# Altium PCB Copy of PCB1.PcbDoc
Units mil, origin at the board's own origin, x right, y up, seen from the top; angles counter-clockwise.
Board outline 2362.2 x 2047.24 mil, 2 copper layers (Top Layer, Bottom Layer); 56 components, 38 nets, 175 pads, 17 vias.
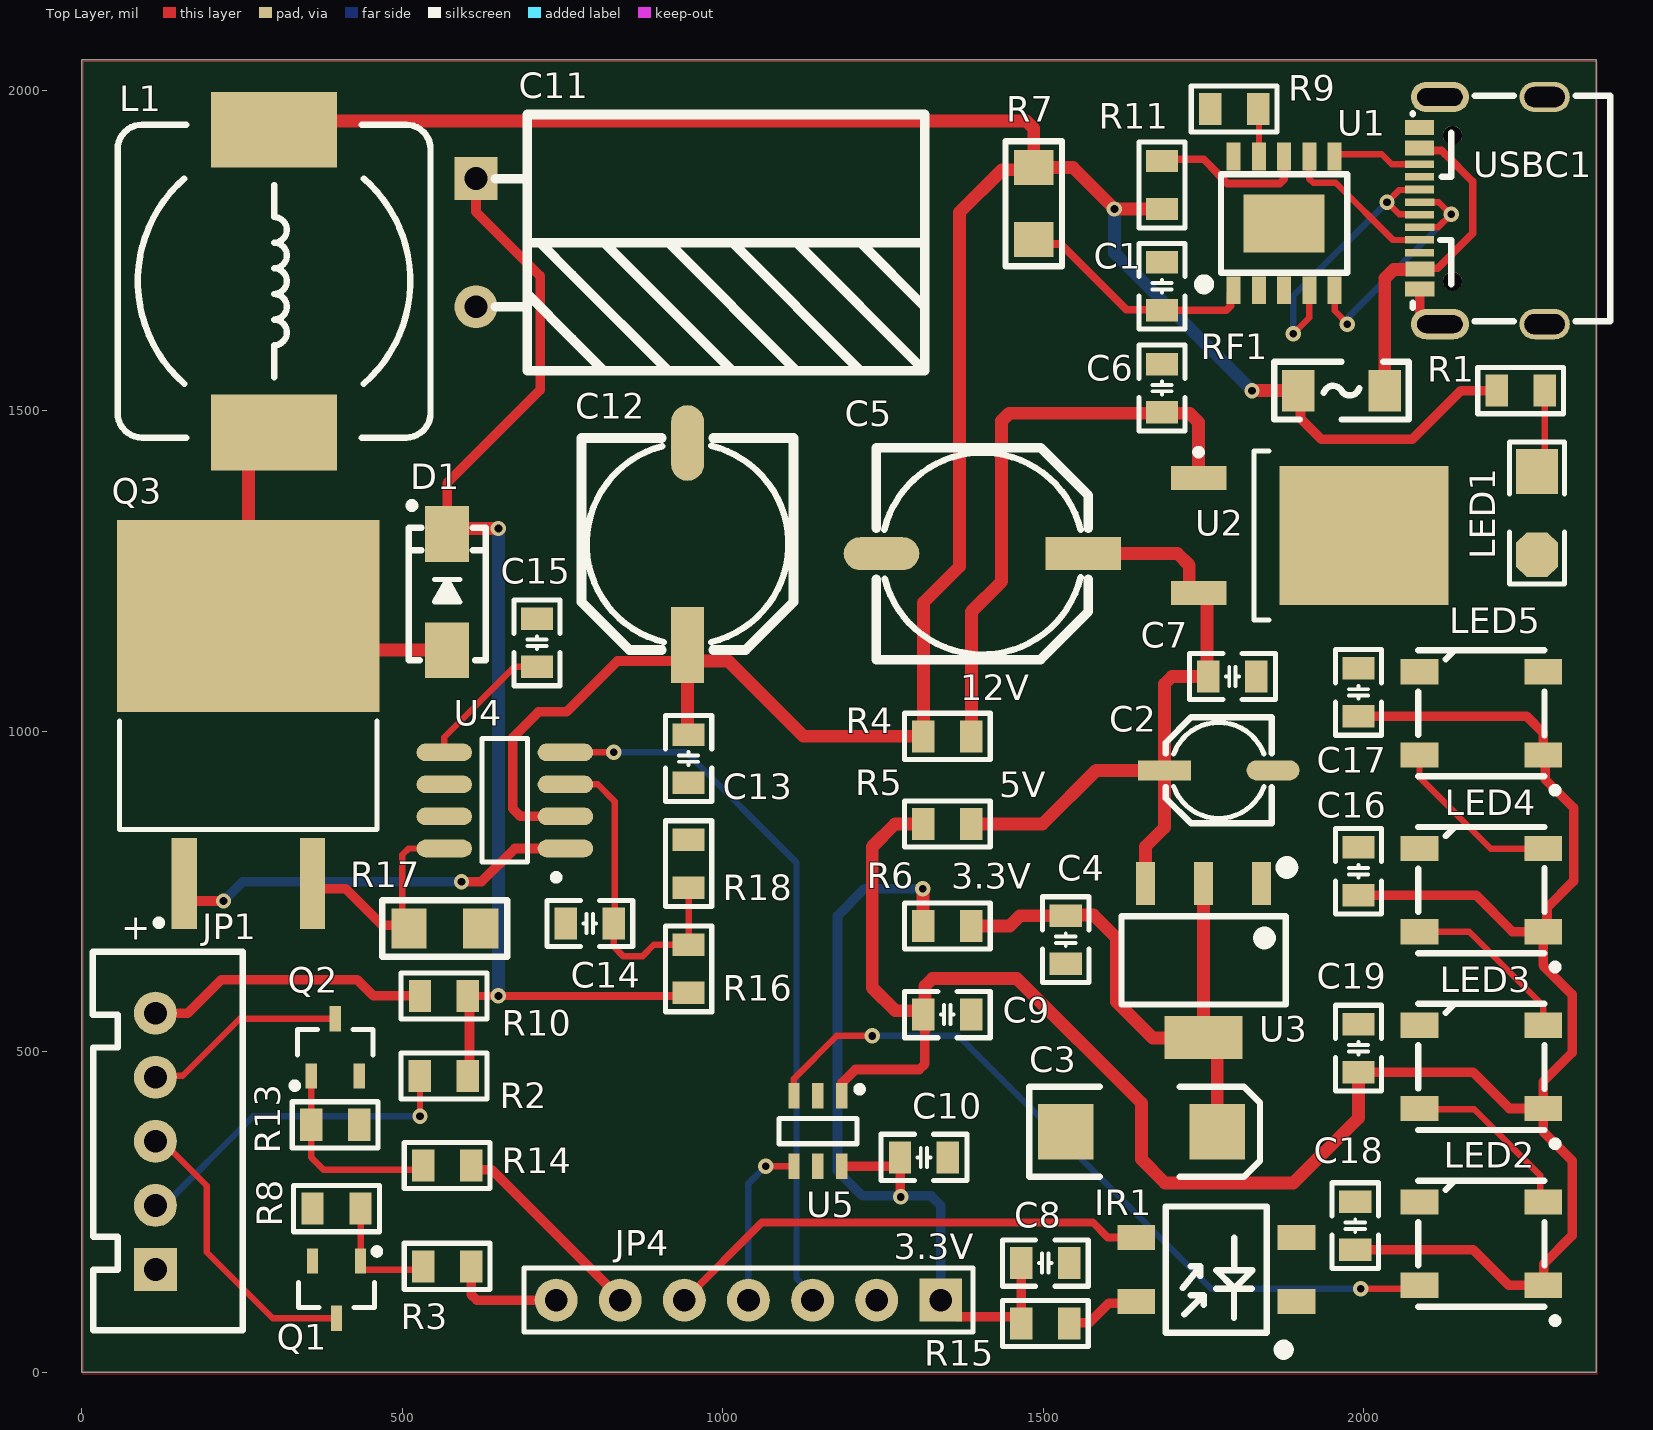
[diagram p0: Top Layer view]
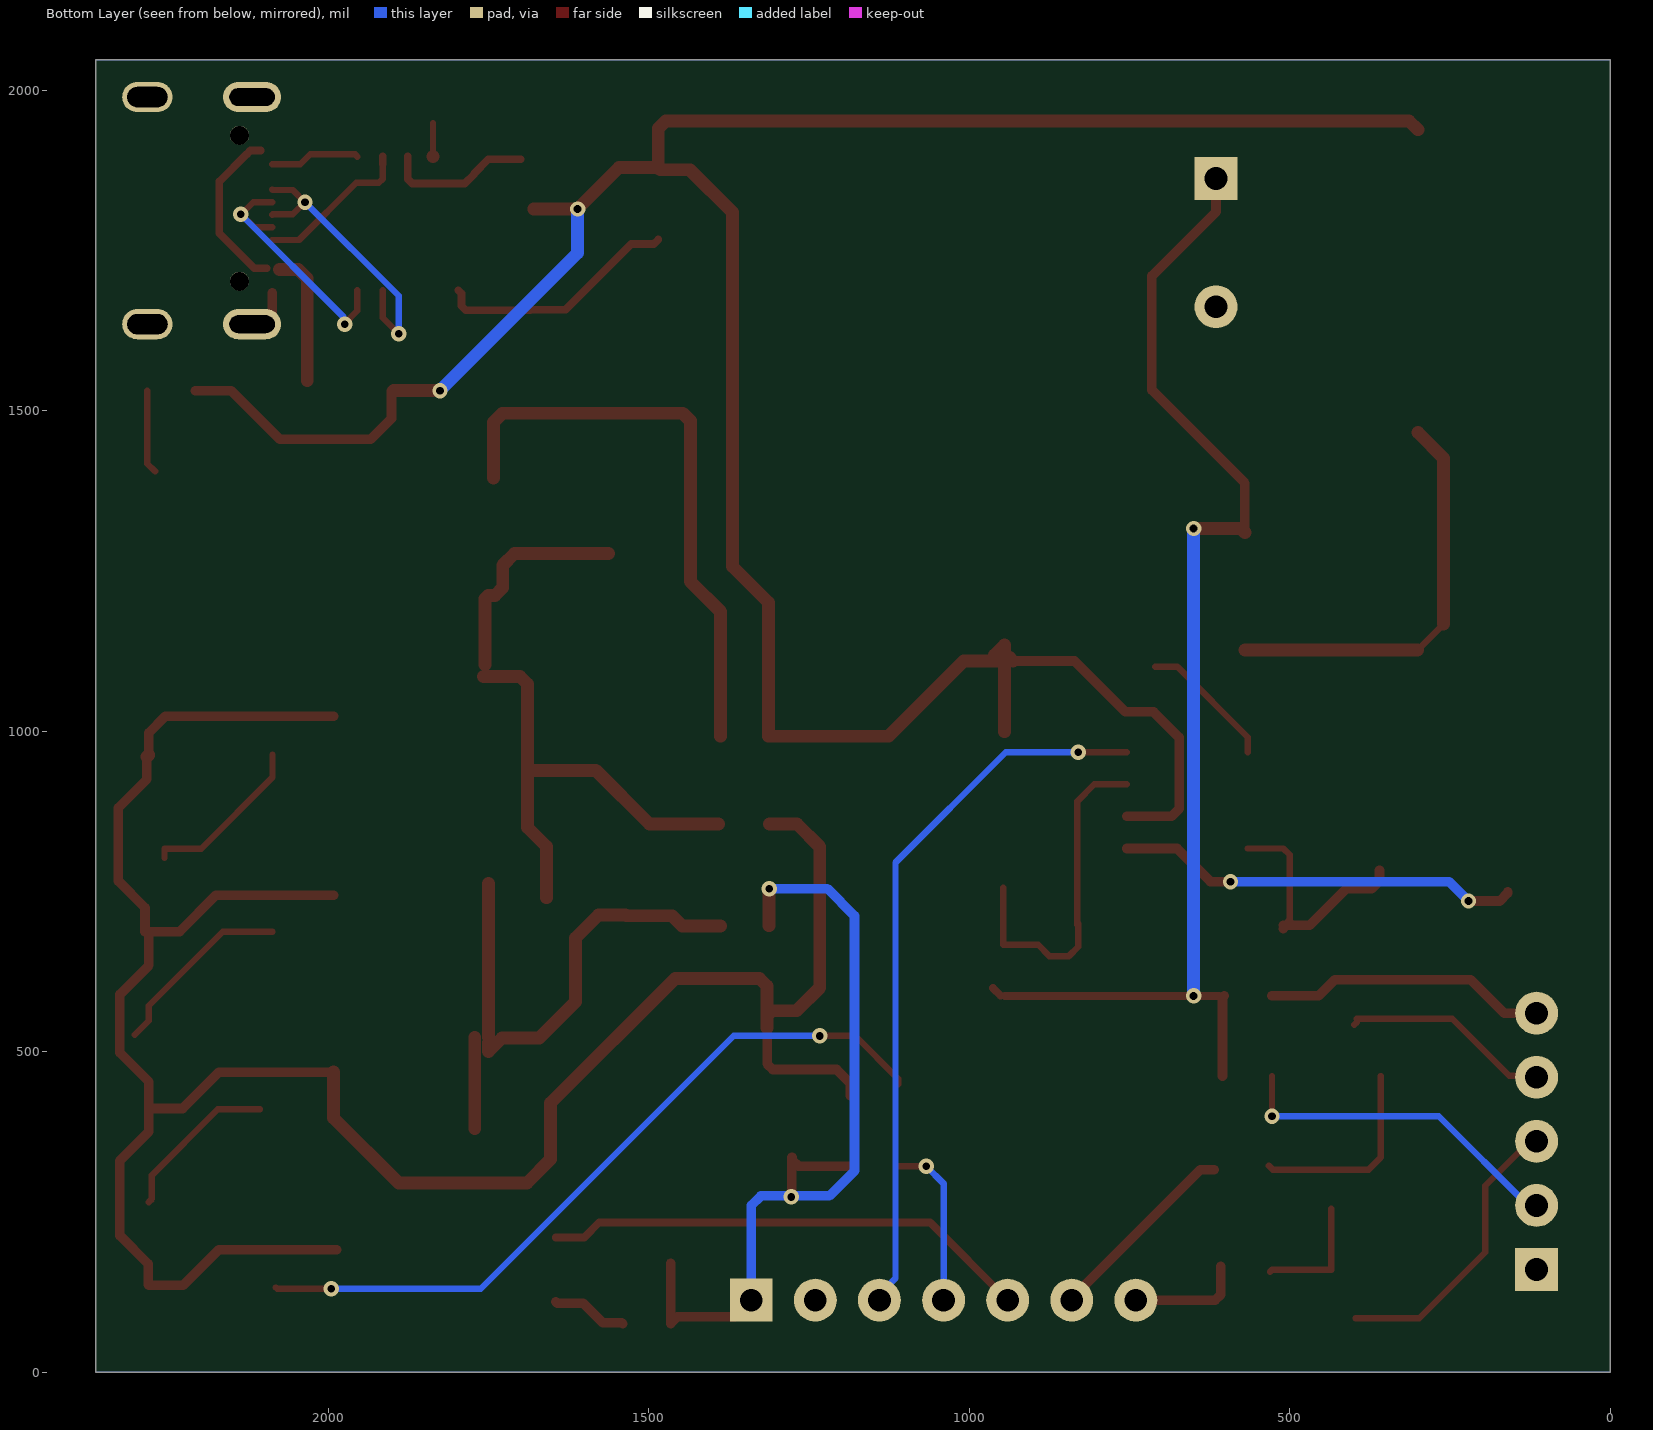
[diagram p1: Bottom Layer view, seen from below]

## Layer stack, top to bottom
Top Solder: solder mask 0.4, Solder Resist, Dk 3.5
Top Layer: signal copper 1.4
Dielectric 1: dielectric 12.6, FR-4, Dk 4.8
Bottom Layer: signal copper 1.4
Bottom Solder: solder mask 0.4, Solder Resist, Dk 3.5

## Board outline
0,0 0,2047.24 2362.2,2047.24 2362.2,0

## Design rules (kind name [scope] priority, off if disabled: settings)
AssemblyTestPointUsage [All] p0: scope1count=1 scope1_0_kind=Board scope1_0_value=Board scope2count=1 scope2_0_kind=Board scope2_0_value=Board commentlength=0
AssemblyTestpoint [All] p0: scope1count=1 scope1_0_kind=Board scope1_0_value=Board scope2count=1 scope2_0_kind=Board scope2_0_value=Board commentlength=0
Clearance [All] p0: scope1count=1 scope1_0_kind=Board scope1_0_value=Board scope2count=1 scope2_0_kind=Board scope2_0_value=Board commentlength=0 gap=8
Clearance [All] p1: gap=8 ignorepadtopadclearanceinfootprint=TRUE
ComponentClearance [All] p0: scope1count=1 scope1_0_kind=Board scope1_0_value=Board scope2count=1 scope2_0_kind=Board scope2_0_value=Board commentlength=0 gap=10 collisioncheckmode=3
DiffPairsRouting [All] p0: scope1count=1 scope1_0_kind=Board scope1_0_value=Board scope2count=1 scope2_0_kind=Board scope2_0_value=Board commentlength=0
FabricationTestPointUsage [All] p0: scope1count=1 scope1_0_kind=Board scope1_0_value=Board scope2count=1 scope2_0_kind=Board scope2_0_value=Board commentlength=0 valid=0 allowmultiple=FALSE
FabricationTestpoint [All] p0: scope1count=1 scope1_0_kind=Board scope1_0_value=Board scope2count=1 scope2_0_kind=Board scope2_0_value=Board commentlength=0 side=3 testpointundercomponent=TRUE minsize=40 maxsize=100 preferedsize=60 minholesize=0 maxholesize=40 preferedholesize=32 testpointgrid=1
FanoutControl Fanout_BGA [All] p0 off: scope1count=1 scope1_0_kind=Board scope1_0_value=Board scope2count=1 scope2_0_kind=Board scope2_0_value=Board commentlength=69 // Protel DXP Scope 1 Expression Was: IsBGA   Fanout_BGA (Default Rule)
FanoutControl Fanout_LCC [All] p0 off: scope1count=1 scope1_0_kind=Board scope1_0_value=Board scope2count=1 scope2_0_kind=Board scope2_0_value=Board commentlength=69 // Protel DXP Scope 1 Expression Was: IsLCC   Fanout_LCC (Default Rule)
FanoutControl Fanout_SOIC [All] p0 off: scope1count=1 scope1_0_kind=Board scope1_0_value=Board scope2count=1 scope2_0_kind=Board scope2_0_value=Board commentlength=71 // Protel DXP Scope 1 Expression Was: IsSOIC   Fanout_SOIC (Default Rule)
FanoutControl Fanout_Small [All] p0 off: scope1count=1 scope1_0_kind=Board scope1_0_value=Board scope2count=1 scope2_0_kind=Board scope2_0_value=Board commentlength=84 // Protel DXP Scope 1 Expression Was: (CompPinCount < 5)   Fanout_Small (Default Rule)
FanoutControl Fanout_Default [All] p0: scope1count=1 scope1_0_kind=Board scope1_0_value=Board scope2count=1 scope2_0_kind=Board scope2_0_value=Board commentlength=30 // Fanout_Default (Default Rule)
Height [All] p0: scope1count=1 scope1_0_kind=Board scope1_0_value=Board scope2count=1 scope2_0_kind=Board scope2_0_value=Board commentlength=0
HoleSize [All] p0: scope1count=1 scope1_0_kind=Board scope1_0_value=Board scope2count=1 scope2_0_kind=Board scope2_0_value=Board commentlength=0 absolutevalues=TRUE maxlimit=200 minlimit=10 maxpercent=80.000 minpercent=20.000
HoleSize [All] p1: absolutevalues=TRUE maxlimit=200 minlimit=10 maxpercent=80.000 minpercent=20.000
HoleToHoleClearance [All] p0: scope1count=1 scope1_0_kind=Board scope1_0_value=Board scope2count=1 scope2_0_kind=Board scope2_0_value=Board commentlength=0
LayerPairs [All] p0: scope1count=1 scope1_0_kind=Board scope1_0_value=Board scope2count=1 scope2_0_kind=Board scope2_0_value=Board commentlength=0 enforce=TRUE
MinimumSolderMaskSliver [All] p0: scope1count=1 scope1_0_kind=Board scope1_0_value=Board scope2count=1 scope2_0_kind=Board scope2_0_value=Board commentlength=0
MinimumSolderMaskSliver [All] p1: minsoldermaskwidth=2
NetAntennae [All] p0: scope1count=1 scope1_0_kind=Board scope1_0_value=Board scope2count=1 scope2_0_kind=Board scope2_0_value=Board commentlength=0
PasteMaskExpansion [All] p0: scope1count=1 scope1_0_kind=Board scope1_0_value=Board scope2count=1 scope2_0_kind=Board scope2_0_value=Board commentlength=0 expansion=0
PlaneClearance [All] p0: scope1count=1 scope1_0_kind=Board scope1_0_value=Board scope2count=1 scope2_0_kind=Board scope2_0_value=Board commentlength=0 clearance=20
PlaneConnect [All] p0: scope1count=1 scope1_0_kind=Board scope1_0_value=Board scope2count=1 scope2_0_kind=Board scope2_0_value=Board commentlength=0 planeconnectstyle=Relief reliefexpansion=20 reliefentries=4 reliefconductorwidth=15 reliefairgap=10
PlaneConnect [All] p1: planeconnectstyle=Relief reliefexpansion=20 reliefentries=4 reliefconductorwidth=15 reliefairgap=10
PolygonConnect [All] p0: scope1count=1 scope1_0_kind=Board scope1_0_value=Board scope2count=1 scope2_0_kind=Board scope2_0_value=Board commentlength=0 connectstyle=Relief reliefconductorwidth=12 reliefentries=4 polygonreliefangle="90 Angle"
PolygonConnect [All] p1: thpad.connectstyle=Relief thpad.reliefconductorwidth=12 thpad.reliefentries=4 thpad.polygonreliefangle="90 Angle" thpad.airgapwidth=10 smdpad.connectstyle=Relief smdpad.reliefconductorwidth=12 smdpad.reliefentries=4 smdpad.polygonreliefangle="90 Angle" smdpad.airgapwidth=10 via.connectstyle=Direct via.reliefconductorwidth=10 via.reliefentries=4 via.polygonreliefangle="90 Angle" via.airgapwidth=10
RoutingCorners [All] p0: scope1count=1 scope1_0_kind=Board scope1_0_value=Board scope2count=1 scope2_0_kind=Board scope2_0_value=Board commentlength=0 cornerstyle=45-Degree minsetback=100 maxsetback=100
RoutingLayers [All] p0: scope1count=1 scope1_0_kind=Board scope1_0_value=Board scope2count=1 scope2_0_kind=Board scope2_0_value=Board commentlength=0 top layer=Automatic bottom layer=Automatic
RoutingPriority [All] p0: scope1count=1 scope1_0_kind=Board scope1_0_value=Board scope2count=1 scope2_0_kind=Board scope2_0_value=Board commentlength=0
RoutingTopology [All] p0: scope1count=1 scope1_0_kind=Board scope1_0_value=Board scope2count=1 scope2_0_kind=Board scope2_0_value=Board commentlength=0 topology=Shortest
RoutingVias [All] p0: scope1count=1 scope1_0_kind=Board scope1_0_value=Board scope2count=1 scope2_0_kind=Board scope2_0_value=Board commentlength=0 holewidth=12 width=24 viastyle="Through Hole" minholewidth=12 minwidth=24 maxholewidth=15 maxwidth=32
RoutingVias [All] p1: holewidth=12 width=24 viastyle="Through Hole" minholewidth=12 minwidth=24 maxholewidth=15 maxwidth=32
ShortCircuit [All] p0: scope1count=1 scope1_0_kind=Board scope1_0_value=Board scope2count=1 scope2_0_kind=Board scope2_0_value=Board commentlength=0 allowed=FALSE
SilkToBoardRegionClearance [All] p0: scope1count=1 scope1_0_kind=Board scope1_0_value=Board scope2count=1 scope2_0_kind=Board scope2_0_value=Board commentlength=0
SilkToSilkClearance [All] p0: scope1count=1 scope1_0_kind=Board scope1_0_value=Board scope2count=1 scope2_0_kind=Board scope2_0_value=Board commentlength=0
SilkToSilkClearance [All] p1: silktosilkclearance=5
SilkToSolderMaskClearance [All] p0 off: scope1count=1 scope1_0_kind=Board scope1_0_value=Board scope2count=1 scope2_0_kind=Board scope2_0_value=Board commentlength=44 // Protel DXP Scope 1 Expression Was: IsPad
SilkToSolderMaskClearance [IsPad] p1: minsilkscreentomaskgap=5 clearancetoexposedcopper=TRUE
SolderMaskExpansion [All] p0: scope1count=1 scope1_0_kind=Board scope1_0_value=Board scope2count=1 scope2_0_kind=Board scope2_0_value=Board commentlength=0 expansion=4
SolderMaskExpansion [All] p1: expansion=4 istentingtop=FALSE
UnRoutedNet [All] p0: scope1count=1 scope1_0_kind=Board scope1_0_value=Board scope2count=1 scope2_0_kind=Board scope2_0_value=Board commentlength=0
UnpouredPolygon [All] p0: scope1count=1 scope1_0_kind=Board scope1_0_value=Board scope2count=1 scope2_0_kind=Board scope2_0_value=Board commentlength=0
Width power [All] p0: scope1count=1 scope1_0_kind=NetClass scope1_0_value=power scope2count=1 scope2_0_kind=Board scope2_0_value=Board commentlength=0 maxlimit=40 minlimit=10 preferedwidth=20
Width [All] p0: scope1count=1 scope1_0_kind=Board scope1_0_value=Board scope2count=1 scope2_0_kind=Board scope2_0_value=Board commentlength=0 maxlimit=40 minlimit=8 preferedwidth=10
Width power [InNetClass('power')] p1: maxlimit=40 minlimit=10 preferedwidth=20
Width [All] p2: maxlimit=40 minlimit=8 preferedwidth=10
25 further rules are at their usual default settings.

## Classes and differential pairs
net class power: GND NetC3_1 NetD1_1 V3.3 V5 V12 VH

## Components (designator, comment, footprint, x,y, rotation, side; value= is the part's Value field where it differs from the comment)
C1 "" "C 0805_L" 1685,1693.87 r90 top
C2 "Cap Pol1" "CM B(4*5.4)" 1773.71,938.75 r180 top
C3 "Cap Pol1" "CD C(6032)" 1652.98,375 r180 top
C4 "Cap" "C 0805_L" 1535,674.65 r90 top
C5 "Cap Pol1" "CM E(8*10.2)" 1405,1276.89 r0 top
C6 "Cap" "C 0805_L" 1685,1535.06 r270 top
C7 "Cap" "C 0805_L" 1795,1085 r180 top
C8 "Cap" "C 0805_L" 1503.07,170 r0 top
C9 "Cap" "C 0805_L" 1350.32,557.71 r180 top
C10 "Cap" "C 0805_L" 1313.78,335 r0 top
C11 "Cap Pol1" "CAP 5.0*10*16-H - GD" 615,1761.89 r270 top
C12 "Cap Pol1" "CM E(8*10.2)" 945,1291.89 r270 top
C13 "Cap" "C 0805_L" 946.71,957.15 r90 top
C14 "Cap" "C 0805_L" 792.6,699.81 r0 top
C15 "Cap" "C 0805_L" 710,1137.6 r90 top
C16 "Cap" "C 0805_L" 1991.57,781.36 r270 top
C17 "Cap" "C 0805_L" 1991.57,1060.36 r270 top
C18 "Cap" "C 0805_L" 1986.57,228.54 r270 top
C19 "Cap" "C 0805_L" 1991.57,505.36 r270 top
D1 "US1G" SMA 570,1216.89 r90 top
IR1 "IRM-H6XXT" SMD4_IR 1770,160 r180 top
JP1 "HDR-1X5" XH2.54-LI-5P 115,360 r90 top
JP4 "HDR-1X7" HDR2.54-LI-7P 1040,112.35 r180 top
L1 "Inductor Iron" CDRH127 300,1701.89 r270 top
LED1 "红色" "LED 1206R" 2270,1340.15 r270 top
LED2 "WS2812C" WS2812 2183.3,200.36 r180 top
LED3 "WS2812C" WS2812 2183.3,476.16 r180 top
LED4 "WS2812C" WS2812 2183.3,751.96 r180 top
LED5 "WS2812C" WS2812 2183.3,1027.76 r180 top
Q1 "A42" SOT23-3L 397.4,128.25 r180 top
Q2 "A42" SOT23-3L 395.32,506.89 r0 top
Q3 "IRF740" TO-263-2L 260,1010 r90 top
R1 "Resistor" "R 0805_L" 2244.6,1531.08 r180 top
R2 "Res Semi" "R 0805_L" 565,461.88 r0 top
R3 "Resistor" "R 0805_L" 570,165 r0 top
R4 "Resistor" "R 0805_L" 1350.32,991.89 r180 top
R5 "Resistor" "R 0805_L" 1350.32,854.89 r180 top
R6 "Resistor" "R 0805_L" 1350.32,695.94 r180 top
R7 "Resistor" "R 1206_L" 1485.06,1821.89 r90 top
R8 "Resistor" "R 0805_L" 397.4,255 r180 top
R9 "Resistor" "R 0805_L" 1797.62,1970.28 r0 top
R10 "Res Semi" "R 0805_L" 565,586.89 r180 top
R11 "Resistor" "R 0805_L" 1685,1851.85 r90 top
R13 "Resistor" "R 0805_L" 395.32,385.89 r0 top
R14 "Resistor" "R 0805_L" 570,322.23 r0 top
R15 "Resistor" "R 0805_L" 1503.07,75.71 r180 top
R16 "Res Semi" "R 0805_L" 946.71,629.13 r90 top
R17 "Res Semi" "R 1206_L" 565.51,691.89 r0 top
R18 "Resistor" "R 0805_L" 946.72,793.14 r270 top
RF1 "FR50-16" "FU 1206" 1965.13,1531.09 r180 top
U1 "CH224K" ESSOP10 1875.63,1791.89 r90 top
U2 "L78M05" TO-252 1915.35,1305 r0 top
U3 "LT1117-3V3" SOT223_L 1750,642.25 r180 top
U4 "MAX1771" SOIC8 660,891.89 r180 top
U5 "SN74LVC1T45" SOT23-6L 1148.36,376.28 r180 top
USBC1 "TYPE-C 2.0 -16P" USB-C-SMD_TYPE-C-USB-5 2184.56,1811.89 r90 top

## Footprints (in the part's own frame and the unit in brackets; to place one, negate y for a bottom-side part, rotate by r counter-clockwise, add the part's x,y. Pads: shape width x height; smd on the part's side, far side on the other; paste and mask are expansions set on the pad)
"C 0805_L" [mil] "无极性贴片电容                                        淘宝ID:黄晶宝石"
  rect 35x50 smd: 1(-37.4,0) 2(37.4,0)
  silkscreen extent -67,-36 67,36
"CAP 5.0*10*16-H - GD" [mm] "脚距5mm直径10mm高度16mm"
  rect 1.7x1.7 hole 0.9: 1(-2.54,0)
  round 1.7 hole 0.9: 2(2.54,0)
  silkscreen extent -5.08,0.76 5.08,17.78
"CD C(6032)" [mm] "长6.0mm，宽3.2mm，厚2.5mm      淘宝ID:黄晶宝石"
  rect 2.2x2.2 smd: 1(-3,0) 2(3,0)
  silkscreen extent -4.7,-1.78 4.44,1.78
CDRH127 [mm] "12*12*8mm（长宽高）"
  rect 3x5 smd: 1(-6,0) 2(6,0)
  silkscreen extent -6.2,-6.2 6.2,6.2
"CM B(4*5.4)" [mm] "贴片电解电容，直径4mm，高5.4mm"
  rect 2.1x0.8 smd: 1(2.15,0)
  oval 2.1x0.8 smd: 2(-2.15,0)
  silkscreen extent -2.1,-2.1 2.1,2.1
"CM E(8*10.2)" [mm] "贴片电解电容，直径8mm，高10.2mm"
  rect 3x1.3 smd: 1(4,0)
  oval 3x1.3 smd: 2(-4,0)
  silkscreen extent -4.2,-4.2 4.2,4.2
ESSOP10 [mm] "ESSOP3.9mm"
  rect 2.3x3.2 smd: 0(0,0)
  rect 1.1x0.55 smd: 1(-2.65,2) 2(-2.65,1) 3(-2.65,0) 4(-2.65,-1) 5(-2.65,-2) 6(2.65,-2) 7(2.65,-1) 8(2.65,0) 9(2.65,1) 10(2.65,2)
  silkscreen extent -2.61,-2.5 1.95,3.37
"FU 1206" [mil] "贴片保险丝"
  rect 50x65 smd: 1(-67.5,0) 2(67.5,0)
  silkscreen extent -105,-45 105,45
HDR2.54-LI-7P [mm] "排针，7脚"
  rect 1.7x1.7 hole 0.9: 1(-7.62,0)
  round 1.7 hole 0.9: 2(-5.08,0) 3(-2.54,0) 4(0,0) 5(2.54,0) 6(5.08,0) 7(7.62,0)
  silkscreen extent -8.89,-1.27 8.89,1.27
"LED 1206R" [mil] "红色1206LED       淘宝ID:黄晶宝石"
  rect 70x65 smd: 1(-65,0)
  oct 70x65 smd: 2(65,0)
  silkscreen extent -111,-43 111,43
"R 0805_L" [mil] "1/8W贴片电阻"
  rect 35x50 smd: 1(-37.4,0) 2(37.4,0)
  silkscreen extent -67,-36 67,36
"R 1206_L" [mil] "1/4W贴片电阻"
  rect 55x62 smd: 1(-55.12,0) 2(57.09,0)
  silkscreen extent -96,-44 98,44
SMA [mm] "4.5x2.6*2.2mm（长宽高，不包括引脚）"
  rect 2.2x1.75 smd: 1(-2.3,0) 2(2.3,0)
  silkscreen extent -2.7,-1.52 3.56,1.52
SMD4_IR [mm]
  rect 1.5x1 smd: 1(-3.175,1.27) 2(-3.175,-1.27) 3(3.175,-1.27) 4(3.175,1.27)
  silkscreen extent -2.87,-2.5 2,3.37
SOIC8 [mm]
  oval 2.2x0.7 smd: 1(-2.4,1.905) 2(-2.4,0.635) 3(-2.4,-0.635) 4(-2.4,-1.905) 5(2.4,-1.905) 6(2.4,-0.635) 7(2.4,0.635) 8(2.4,1.905)
  silkscreen extent -2.16,-2.45 0.9,3.17
SOT23-3L [mm] "3x1.3x1mm(长宽高)    封装库来自淘宝卖家 ID：黄晶宝石"
  rect 0.45x1 smd: 1(-0.95,-1.143) 2(0.95,-1.143) 3(0,1.125)
  silkscreen extent -1.73,-1.65 1.5,0.7
SOT23-6L [mm] "3x1.6x1.1mm(长宽高) 封装库来自淘宝卖家 ID：黄晶宝石"
  rect 0.45x1 smd: 1(-0.95,-1.397) 2(0,-1.397) 3(0.95,-1.397) 4(0.95,1.397) 5(0,1.397) 6(-0.95,1.397)
  silkscreen extent -1.78,-1.78 1.55,0.51
SOT223_L [mm] "6.4x7x1.6mm(长宽高)"
  rect 0.75x1.7 smd: 1(-2.3,-3.048) 2(0,-3.048) 3(2.3,-3.048)
  rect 3.1x1.7 smd: 2(0,3.048)
  silkscreen extent -3.5,-3.88 3.25,1.75
TO-252 [mm]
  rect 2.2x0.95 smd: 1(-4.4,2.28) 3(-4.4,-2.28)
  rect 6.7x5.5 smd: 2(2.15,0)
  silkscreen extent -4.52,-3.35 -1.6,3.43
TO-263-2L [mm]
  rect 3.6x1 smd: 1(-6.3,2.54) 3(-6.3,-2.54)
  rect 7.6x10.4 smd: 2(4.3,0)
  silkscreen extent -7.97,-5.1 0.15,5.1
USB-C-SMD_TYPE-C-USB-5 [mm]
  oval 1.2x2 hole 0.8 slot 1.6 at 90 deg: 0(-4.5,-2.475) 0(4.5,-2.475)
  oval 1.2x2.3 hole 0.7 slot 1.8 at 90 deg: 0(-4.5,1.675) 0(4.5,1.675)
  rect 0.3x1.15 smd: A1(-3.263,2.473) A4(-2.462,2.471) A5(-1.162,2.475) A6(-0.162,2.475) A7(0.337,2.473) A9(2.638,2.475) A12(3.438,2.475) B1(3.138,2.475) B4(2.337,2.475) B5(1.838,2.475) B6(0.838,2.475) B7(-0.663,2.473) B9(-2.162,2.471) B12(-2.963,2.473)
  rect 0.3x1.148 smd: A8(-1.663,2.475) B8(1.337,2.475)
  round 0.75 hole 0.75 unplated: ""(-2.803,1.175) ""(2.978,1.175)
  silkscreen extent -4.38,-5.08 4.56,2.75
WS2812 [mm]
  rect 1.5x1 smd: 1(-2.45,1.65) 2(-2.45,-1.65) 3(2.45,-1.65) 4(2.45,1.65)
  silkscreen extent -3.05,-2.5 2.5,3.17
XH2.54-LI-5P [mm] "接插件，5P  淘宝ID:黄晶宝石   店铺网址:https://shop463601444.taobao.com"
  rect 1.7x1.7 hole 0.9: 1(-5.08,0)
  round 1.7 hole 0.9: 2(-2.54,0) 3(0,0) 4(2.54,0) 5(5.08,0)
  silkscreen extent -7.48,-3.45 7.52,2.49

## Part data
C1: library part Cap, "Capacitor"
C2 C3: "Polarized Capacitor (Radial)"
C4 C6 C7 C8 C9 C10 C13 C14 C15 C16 C17 C18 C19: "Capacitor"
C5 C12: library part "Cap Pol1_2", "Polarized Capacitor (Radial)"
C11: library part "Cap Pol1_3", "Polarized Capacitor (Radial)"
D1: library part "D Schottky", "Schottky Diode"
IR1: library part IR
JP1: library part "Header 5", "5P接插件"
JP4: library part "Header 7", "7P接插件"
L1: "Magnetic-Core Inductor"
LED1: library part LED-SMD, "贴片LED"
LED2 LED3 LED4 LED5: library part WS2812, "RGB发光管"
Q1 Q2: library part BCP68, "NPN三极管"
Q3: library part NMOS-2, "N-Channel Power MOSFET"
R2 R10 R16 R17: "Semiconductor Resistor"
RF1: library part PPTC, "PPTC自恢复保险丝"
U1: "PD协议受电芯片"
U3: library part AMS1117, "三端稳压芯片"
U5: "单路逻辑电平转换"
USBC1: library part "USB2.0 Type-C 16Pin母座", "USB2.0 Type-C 母座 16Pin"

## Via types
v1: diameter 24, hole 12, Top Layer to Bottom Layer, tented both sides, 17 vias

## Nets (pads, with @x,y where several pads share a name; then routed paths per layer and width w, separated by ;. In a path a pad name is that pad's centre, name@x,y a point inside that pad or via, vN(x,y) a via of type N, cw(c..) or ccw(c..) an arc to the next point about the centre after c; other vN are vias at no path point)
CC1: U1.7 USBC1.A5 | length 258.5
  Top Layer w10: U1.7 1915,1861.17 1921.01,1855.17 1956.36,1855.17 2045.4,1766.12 USBC1.A5
  Top Layer w12: U1.7@1915,1884.23 U1.7
CC2: U1.6 USBC1.B5 | length 140.7
  Top Layer w10: U1.6 1957.91,1899.76 2027.87,1899.76 2043.4,1884.24 USBC1.B5
DM: U1.5 USBC1.A7 USBC1.B7 | length 413.2
  Top Layer w10: U1.5 1954.37,1655.48 1974.06,1635.79 v1(1974.06,1634.72) ; USBC1.B7 2115.76,1785.8 v1(2136.22,1806.27) ; USBC1.A7 2116.81,1825.17 2134.83,1807.16 v1@2134.83,1806.27
  Bottom Layer w10: v1(1974.06,1634.72) 1976.73,1637.4 1976.73,1646.78 v1(2136.22,1806.27)
DP: U1.4 USBC1.A6 USBC1.B6 | length 462.1
  Top Layer w10: v1(1890,1620) 1915,1645 U1.4 ; USBC1.A6 2086.35,1806.27 2055.3,1806.27 v1@2036.4,1825.17 ; USBC1.B6 2086.34,1844.08 2055.3,1844.08 v1@2036.4,1825.17 ; v1@2036.4,1825.17 v1(2036.03,1825.17) v1@2036.4,1825.17
  Bottom Layer w10: v1(1890,1620) 1890,1679.15 v1(2036.03,1825.17)
GND: C1.2 C2.2 C3.2 C4.1 C5.2 C6.1 C7.1 C8.2 C9.1 C10.2 C11.2 C12.2 C13.1 C14.1 C15.2 C16.1 C17.1 C18.1 C19.1 IR1.1 IR1.2 JP1.1 JP4.2 LED1.2 LED2.3 LED3.3 LED4.3 LED5.3 Q1.2 Q2.2 R8.2 R9.1 R13.2 R17.2 R18.1 U1.0 U2.2 U3.1 U4.6 U4.7 U5.2 U5.5 USBC1.0 USBC1.A1 USBC1.A12 USBC1.B1 USBC1.B12 | length 69.8
  Top Layer w10: USBC1.A1@2086.28,1682.54 USBC1.A1 ; USBC1.0@2087.18,1654.59 2107.05,1634.72 USBC1.0@2118.62,1634.72
  Top Layer w15: USBC1.0@2087.18,1654.59 USBC1.A1
HV_EN: JP4.3 U4.4 | length 1124.7
  Top Layer w10: U4.4 v1(830,966.89)
  Bottom Layer w10: v1(830,966.89) 943.11,966.89 1115,795 1115,146.67 1140,121.67 JP4.3
IR: IR1.3 JP4.5 | length 764.9
  Top Layer w12: JP4.5 1061.15,233.5 1577.18,233.5 1600.68,210 IR1.3
NetC1_1: C1.1 R7.1 U1.1 | length 381.4
  Top Layer w12: R7.1 1491.98,1759.85 1527.03,1759.85 1629.8,1657.09 C1.1@1685,1657.09 ; C1.1 1785.03,1656.47 1792.06,1663.5 1792.06,1682.73 U1.1
NetC2_1: C2.1 C5.1 C7.2 R5.1 U2.3 U3.3 | length 1088.5
  Top Layer w20: R5.1@1390.94,854.89 1498.69,854.89 1582.54,938.75 1663.9,938.75 C2.1@1680.2,938.75 ; C5.1 1709.43,1276.89 1727.6,1258.72 1727.6,1223.94 1739.86,1211.68 1750.21,1211.68 1755.35,1206.54 C7.2@1755.35,1103.36 ; U3.3@1659.45,740 1659.45,820.09 1689.06,849.7 C2.1 1689.06,1073.29 1700.78,1085 C7.2
NetC3_1: C3.1 C4.2 R6.1 U3.2 | length 911.2
  Top Layer w20: R6.1 1447.63,695.94 1463.74,712.05 C4.2 ; C4.2@1536.02,713.27 1578.28,713.27 1614.17,677.38 1614.17,577.78 1670.69,521.26 1728.74,521.26 1750,500 U3.2@1750,514.29 ; U3.2@1750,522.25 U3.2@1750,762.25 ; C3.1@1771.22,380 U3.2@1771.22,522.25
NetC6_2: C6.2 R4.1 U2.1 | length 916.7
  Top Layer w20: R4.1 1387.72,1186.07 1435,1233.35 1435,1484.14 1446.72,1495.85 1728.11,1495.85 1742.13,1481.83 U2.1
NetC14_2: C14.2 R16.2 R18.2 U4.3 | length 537
  Top Layer w10: U4.3 805,916.89 831.16,890.73 C14.2@831.16,699.8 ; C14.2@831.16,697.89 C14.2@831.16,699.8 ; R18.2 R16.2 892.4,666.53 874.9,649.03 844.41,649.03 830,663.45 C14.2 C14.2@831.16,699.8
NetC15_1: C15.1 U4.5 | length 213.5
  Top Layer w10: U4.5 565.51,990.51 675.2,1100.2 C15.1
NetD1_1: D1.1 L1.2 Q3.2 | length 642.1
  Top Layer w10: Q3.2@260,1166.89 Q3.2@300.55,1126.34
  Top Layer w20: Q3.2@260,1166.89 260,1425.67 L1.2 ; Q3.2@300.55,1126.34 D1.1
NetIR1_4: IR1.4 R15.1 | length 118.7
  Top Layer w15: R15.1 1542.07,77.31 1571.68,77.31 1601.76,107.38 1642.39,107.38 IR1.4
NetJP1_2: JP1.2 R2.1 | length 526.3
  Top Layer w10: v1(527.6,399.37) R2.1
  Bottom Layer w10: JP1.2 128.18,260 267.55,399.37 v1@521.02,399.37
NetJP1_3: JP1.3 Q1.3 | length 457.5
  Top Layer w10: JP1.3 125.58,360 195,290.58 195,186.89 297.93,83.96 Q1.3
NetJP1_4: JP1.4 Q2.3 | length 323.5
  Top Layer w10: JP1.4 117.55,462.55 157.61,462.55 246.23,551.18 Q2.3 ; Q2.3@395.32,545.55 Q2.3@399.17,541.69
NetJP1_5: JP1.5 R10.2 | length 444.4
  Top Layer w15: JP1.5 165.46,560 217.35,611.89 430,611.89 455,586.89 R10.2
NetLED1_1: LED1.1 R1.1 | length 130.9
  Top Layer w10: LED1.1 2282.01,1417.16 R1.1
NetLED2_2: LED2.2 LED3.4 | length 255.1
  Top Layer w10: LED3.4@2106.38,410 2172.23,410 2274.89,307.34 2274.89,270.18 LED2.2
NetLED3_2: LED3.2 LED4.4 | length 294.9
  Top Layer w10: LED4.4 2164.45,687 2279.74,571.72 2279.74,548.15 LED3.2@2301.45,526.44
NetLED4_2: LED4.2 LED5.4 | length 263.7
  Top Layer w10: LED5.4 2086.85,927.76 2198.2,816.41 2255.23,816.41 LED4.2@2255.25,802.25
NetQ1_1: Q1.1 R3.1 R8.1 | length 192.2
  Top Layer w10: Q1.1@434.8,160 527.07,160 R3.1@530.7,156.37 ; Q1.1@435,160.2 R8.1@435,255
NetQ2_1: Q2.1 R13.1 R14.1 | length 312.2
  Top Layer w10: Q2.1 R13.1 357.92,378.38 357.91,351.88 357.91,334.93 377.04,315.8 526.16,315.8 R14.1
NetQ3_1: Q3.1 U4.1 | length 635.8
  Top Layer w15: Q3.1@160,749.57 160,747.19 172.19,735 v1(221.11,735) ; v1(592.42,765.17) 623.8,765.17 675.52,816.89 U4.1
  Bottom Layer w15: v1(221.11,735) 251.28,765.17 v1(592.42,765.17)
NetQ3_3: Q3.3 R17.1 U4.8 | length 378.8
  Top Layer w10: R17.1@500,706.77 500,806.89 510,816.89 U4.8
  Top Layer w15: Q3.3@360,782.68 360,766.19 372.19,754 412.05,754 468.67,697.38 509.39,697.38 R17.1@509.88,696.89 ; R17.1@500.51,701.77 R17.1
NetR9_2: R9.2 U1.9 | length 52.4
  Top Layer w10: U1.9@1836.43,1896.39 R9.2@1836.43,1948.52
  Top Layer w20: U1.9 U1.9@1836.43,1896.39
NetR11_2: R11.2 U1.8 | length 229.8
  Top Layer w12: R11.2@1700,1891.89 1750,1891.89 1772.06,1869.83 1772.06,1868.77 1786.69,1854.14 1868.6,1854.14 1875.63,1861.17 U1.8
NixieTubeA: JP4.6 R14.2 | length 333.1
  Top Layer w15: R14.2@618.2,315.8 639.2,315.8 830.06,124.94 830.06,96.83 JP4.6@840,86.89
NixieTubeB: JP4.7 R3.2 | length 180.1
  Top Layer w15: R3.2 607.4,121.14 616.19,112.35 JP4.7
RGB: LED2.4 U5.3 | length 1171.5
  Top Layer w10: U5.3@1110.96,448.79 1110.96,457.59 1177.87,524.5 v1(1233.22,524.5) ; v1(1995,129.87) 2079.48,129.87 LED2.4@2081.63,132.01
  Bottom Layer w10: v1(1233.22,524.5) 1367.39,524.5 1762.02,129.87 v1(1995,129.87)
RGB_ESP: JP4.4 U5.4 | length 264.3
  Top Layer w10: v1(1067.07,321.28) U5.4
  Bottom Layer w10: JP4.4@1039.34,112.35 1040,113.01 1040,294.22 v1(1067.07,321.28)
V3.3: C8.1 C10.1 JP4.1 R6.2 R15.2 U5.6 | length 1332.9
  Top Layer w15: U5.6 1266.37,321.28 1276.37,331.28 C10.1 1277.07,334.3 v1@1277.07,274.01 ; v1(1312.06,754.24) v1@1312.49,753.81 ; R6.2@1312.49,696.37 R6.2 ; JP4.1 1365.96,86.38 1374.5,86.38 1374.75,86.13 1455.67,86.13 R15.2@1465.66,76.13 ; R15.2 R15.2@1465.66,76.13 ; C8.1 R15.2@1465.66,76.13
  Top Layer w20: R6.2@1312.49,696.37 v1@1312.49,753.81
  Bottom Layer w15: v1(1312.06,754.24) 1221.33,754.24 1178.98,711.89 1178.98,314.06 1218.04,275 1277.77,275 1325,275 1340,260 JP4.1
  other v1: 1277.77,273.31
V5: C9.2 C16.2 C17.2 C18.2 C19.2 LED2.1 LED3.1 LED4.1 LED5.1 R5.2 U5.1 | length 3889.5
  Top Layer w15: U5.1 1185.76,450.97 1206.85,472.06 1306.41,472.06 1315.2,480.85 C9.2@1315.2,536.89 ; C18.2 2170.42,191.14 2226.17,135.4 LED2.1 2280.61,136.25 2280.61,168.8 2325,213.19 2325,330 2279.76,375.24 LED3.1 ; C19.2 2170.19,467.96 2226.96,411.2 LED3.1 ; C16.2 2175,743.96 2231.96,687 LED4.1 ; C17.2 2254.2,1022.96 2279.76,997.4 LED5.1 ; LED5.1@2282.69,959.88 2282.69,924.83 2327.14,880.38 2327.14,765.9 2285.68,724.44 2285.68,687 LED4.1 ; LED3.1 2279.76,452.95 2325,498.2 2325,589.36 2279.76,634.6 LED4.1
  Top Layer w20: R5.2@1311.66,854.9 1268.68,854.9 1233.22,819.44 1233.22,599.67 1269.18,563.71 1306.92,563.71 C9.2 ; C9.2@1315.2,536.89 1315.2,602.42 1326.91,614.14 1458.52,614.14 1652.98,419.68 1652.98,332.02 1690,295 1890,295 1991.56,396.56 C19.2 ; LED5.1 LED5.1@2282.69,959.88
V12: C12.1 C13.2 L1.1 R1.2 R4.2 R7.2 R11.1 RF1.2 U4.2 | length 4392.9
  Top Layer w15: U4.2 684.1,866.89 672.38,878.61 672.38,990.21 712.17,1030 756.4,1030 835.78,1109.37 C12.1@931.89,1109.37 ; RF1.2@1901.21,1531.09 1901.21,1487.53 1933.74,1455 2075.41,1455 2151.5,1531.09 R1.2
  Top Layer w20: L1.1 313.78,1951.89 1473.35,1951.89 1485.06,1940.17 R7.2 ; C12.1@931.89,1109.37 C12.1@938.44,1115.93 ; C13.2@945,998.91 C12.1@945,1109.37 ; C12.1@960.59,1118.82 C12.1 945,1122.48 C12.1@945,1109.37 ; R11.1@1679.27,1814.45 v1(1610.89,1814.45) 1546.36,1878.98 R7.2 ; v1(1825.43,1531.09) RF1.2 ; C12.1@945,1109.37 960.59,1109.37 1008.52,1109.37 1125.99,991.89 R4.2 1312.92,1200.37 1369.37,1256.82 1369.37,1809.37 1435.78,1875.78 1481.87,1875.78 R7.2
  Bottom Layer w20: v1(1610.89,1814.45) 1610.89,1745.63 v1(1825.43,1531.09)
VBUS: RF1.1 USBC1.A4 USBC1.A9 USBC1.B4 USBC1.B9 | length 469.9
  Top Layer w12: USBC1.B9@2095.98,1721.89 2115,1721.89 2169.64,1776.53 2169.64,1857.25 2126.54,1900.35 2126.39,1900.35 2121.09,1905.65 USBC1.B4@2105,1905.65
  Top Layer w20: RF1.1@2032.63,1546.89 2032.63,1706.11 2046.64,1720.12 USBC1.A4@2075.82,1720.12
VH: C11.1 D1.2 R2.2 R10.1 R16.1 | length 1945.5
  Top Layer w12: R10.1@610,586.89 v1(650,586.89) ; v1@648.66,586.89 R16.1@944.1,586.89 ; R16.1@951.1,587.44 R16.1@962.81,599.15
  Top Layer w15: D1.2 570,1309.94 570,1386.89 715,1531.89 715,1710 615,1810 C11.1 ; R10.1 604.9,584.4 R2.2@604.9,461.88
  Top Layer w20: D1.2@570,1309.94 576.02,1315.96 v1(650,1315.96)
  Bottom Layer w20: v1(650,586.89) v1(650,1315.96)
pads on no net: LED5.2 U1.2 U1.3 U1.10 USBC1. USBC1.A8 USBC1.B8

## Polygon pours and split planes (outlines as drawn)
GND on Bottom Layer "NONET_L02_P-001" (solid, pour order 0): 0,2047.24 0,0 2362.2,0 2362.2,2047.24
GND on Top Layer "NONET_L02_P-001" (solid, remove dead copper, pour order 1): 1.5,2044.5 1.5,-2.75 2363.71,-2.75 2363.71,2044.5

## Silkscreen, mask and mechanical layers (free items; w line width, h text height)
Top Overlay:
  text "12V" at 1370.09,1047.89 h40
  text "5V" at 1431,896.9 h40
  text "3.3V" at 1356.32,754.06 h40
  text "+" at 61.94,674.34 h40
  text "3.3V" at 1266.81,176 h40
Mechanical 1:
  the board outline again, w10

## Text inside footprints (layer, text, board x,y; h text height)
U2: Mechanical 1 "Cap" at 1613.76,1608.44 h40